# EAGLE board PowerBoard (EAGLE 9.6.2)
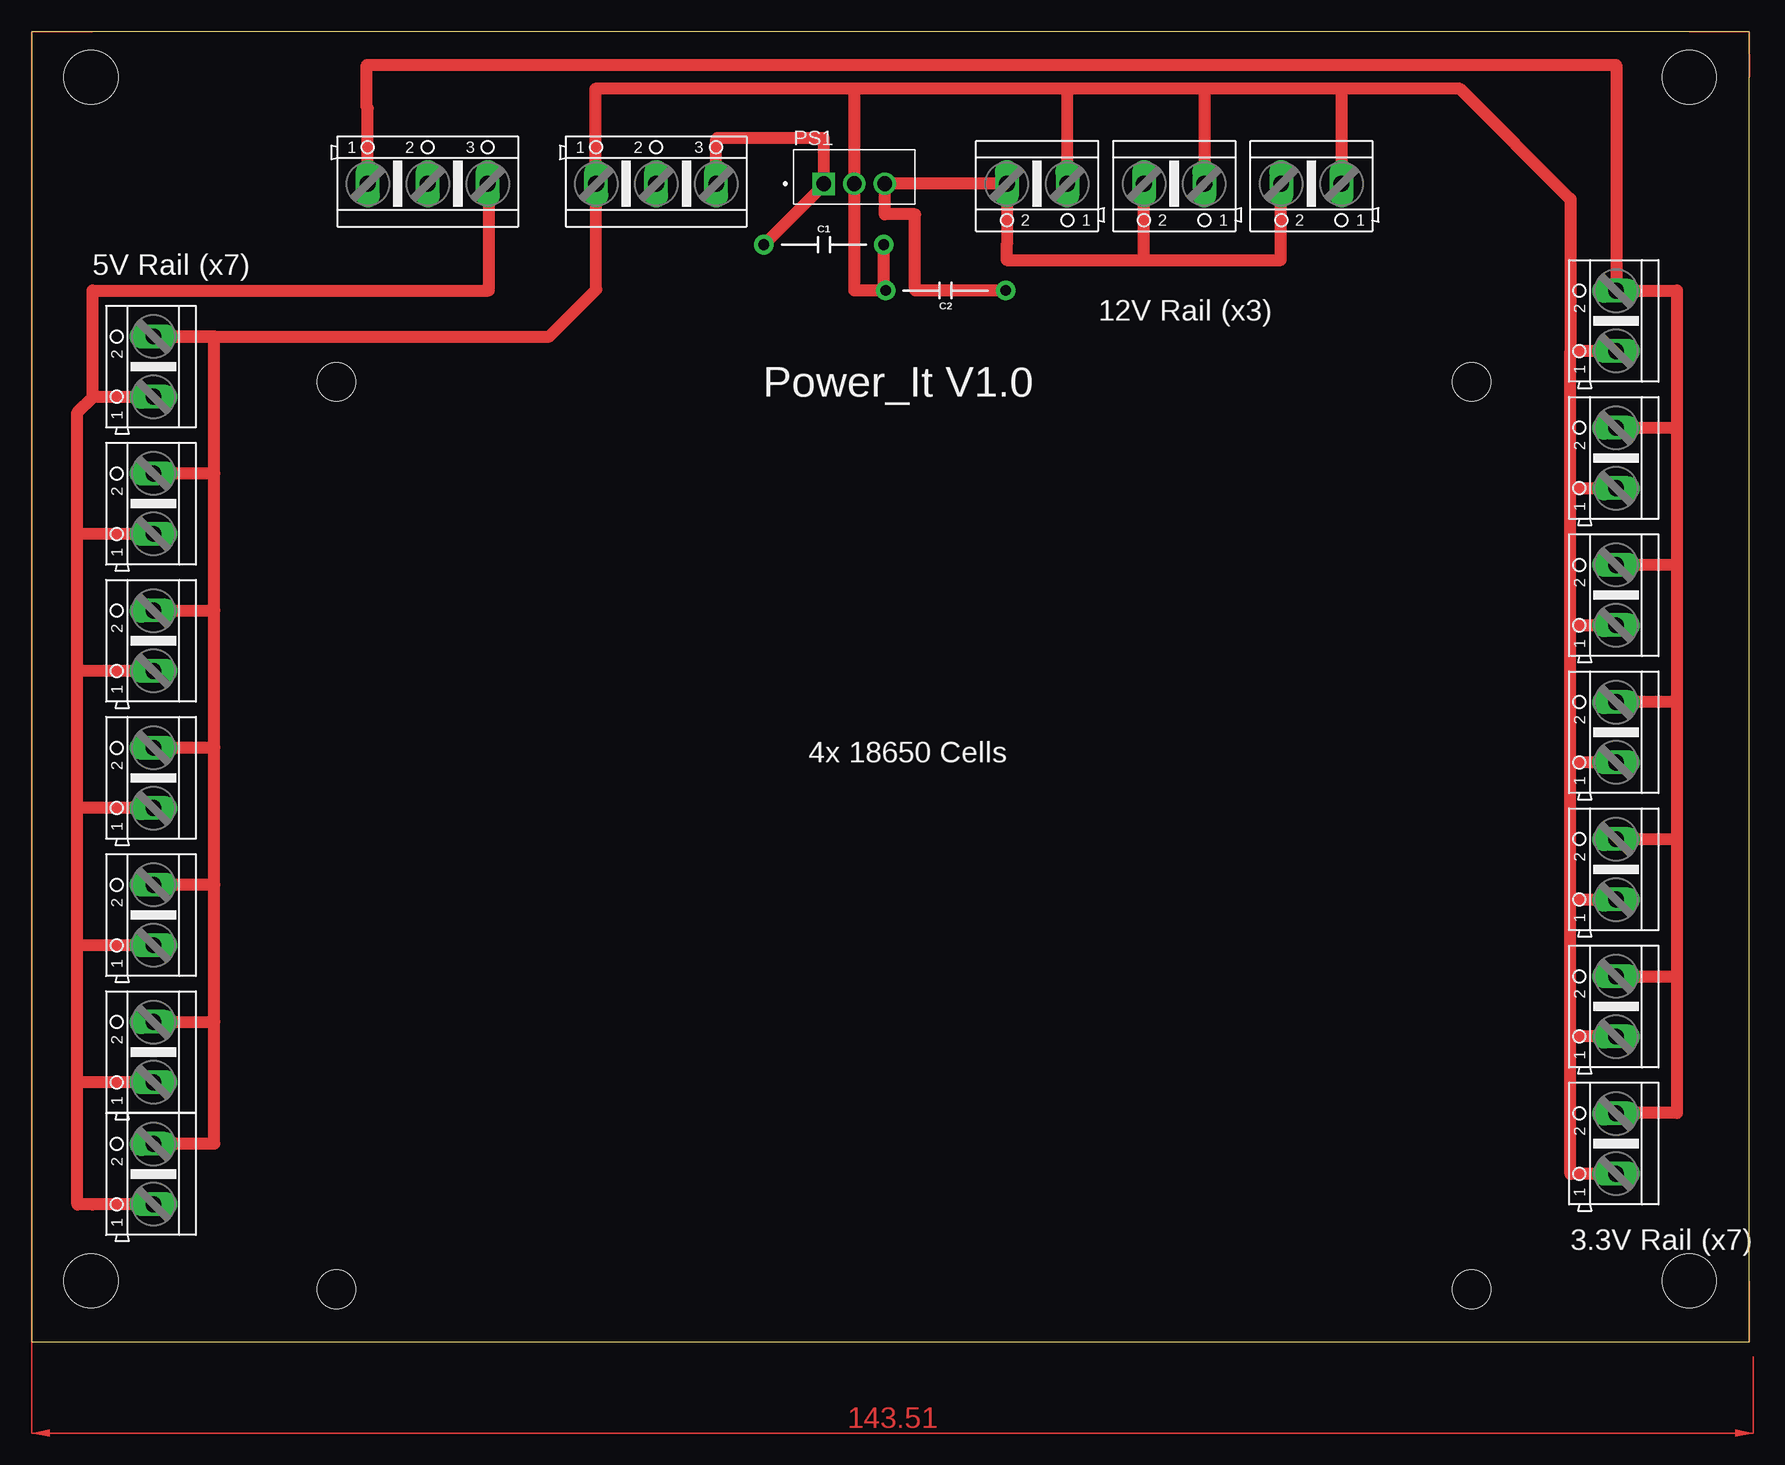
[diagram p0: board, top side]

Size 143.18 x 109.21 mm. Coordinates in mm from the lower left corner, seen from the top.
Outline: 0,0 143.18,0 143.18,109.21 0,109.21 0,0
Copper layers (1*16): Top 0.035mm / dielectric 1.5mm / Bottom 0.035mm
Design rules "PowerBoard": minimum track width 1mm, minimum drill 0.35mm, track to track 1mm, track to pad 1mm, pad to pad 0.205mm, via to via 0.205mm, smd to smd 6mil, copper to edge 40mil, drill to drill 6mil, minimum pad ring 10mil, minimum via ring 8mil, stop-mask expansion 4mil, vias tented up to drill 0mil, thermal gap 10mil
Holes 3.2 mm at 25.4,4.36 25.4,80.01 120.05,4.36 120.05,80.01
Holes 4.5 mm at 4.95,5.08 4.95,105.41 138.18,105.41 138.18,5.08

## Footprints (pad centres in the part's own frame; a part is rotated, then mirrored left to right if it is on the bottom)
CAP-PTH-10MM = drill 0.9 pad 1.651: 1 -5,0; 2 5,0
VREG_LM7812 = drill 1.24 square: 1 -2.54,0 | drill 1.24: 2 0,0; 3 2.54,0
AK500/3 = drill 1.321 long: 1 -5.004,0; 2 0,0; 3 5.004,0
AK500/2 = drill 1.321 long: 1 -2.515,0; 2 2.515,0

## Placement (x,y rotation side)
C1  10nF  [CAP-PTH-10MM]  66.04,91.44 0 top
C2  10nF  [CAP-PTH-10MM]  76.2,87.63 180 top
PS1  LM7812  [VREG_LM7812]  68.58,96.52 0 top
X1  [AK500/3]  33.02,96.52 0 top
X2  [AK500/3]  52.07,96.52 0 top
X3  [AK500/2]  10.16,81.28 90 top
X4  [AK500/2]  10.16,69.85 90 top
X5  [AK500/2]  10.16,58.42 90 top
X6  [AK500/2]  10.16,46.99 90 top
X7  [AK500/2]  10.16,35.56 90 top
X8  [AK500/2]  10.16,24.13 90 top
X9  [AK500/2]  10.16,13.97 90 top
X10  [AK500/2]  132.08,85.09 90 top
X11  [AK500/2]  132.08,73.66 90 top
X12  [AK500/2]  132.08,62.23 90 top
X13  [AK500/2]  132.08,50.8 90 top
X14  [AK500/2]  132.08,39.37 90 top
X15  [AK500/2]  132.08,27.94 90 top
X16  [AK500/2]  132.08,16.51 90 top
X17  [AK500/2]  83.82,96.52 180 top
X18  [AK500/2]  95.25,96.52 180 top
X19  [AK500/2]  106.68,96.52 180 top

## Library data of the parts
C1 C2 = SparkFun-Capacitors; PROD_ID: CAP-09321
PS1 = LM7812; AVAILABILITY: In Stock; DESCRIPTION: Linear Voltage Regulator IC Positive Fixed 1 Output 1.5A DDPAK/TO-263-3; MF: Texas Instruments; MP: LM7812; PACKAGE: None; PRICE: None; PURCHASE-URL: https://pricing.snapeda.com/search/part/LM7812/?ref=eda
X1-X19 = con-ptr500; OC_FARNELL: unknown; OC_NEWARK: unknown

## Nets
N$1: C1.1 PS1.1 X2.3
N$2: C1.2 C2.2 PS1.2 X2.1 X3.2 X4.2 X5.2 X6.2 X7.2 X8.2 X9.2 X10.1 X11.1 X12.1 X13.1 X14.1 X15.1 X16.1 X17.1 X18.1 X19.1
N$3: X1.3 X3.1 X4.1 X5.1 X6.1 X7.1 X8.1 X9.1
N$4: C2.1 PS1.3 X17.2 X18.2 X19.2
N$5: X1.1 X10.2 X11.2 X12.2 X13.2 X14.2 X15.2 X16.2

## Tracks (layer width: path | path; a pad name or v marks a point on that pad's centre or on a via)
N$1
  Top 1: X2.3 57.07,100.25 57.15,100.33 66.04,100.33 PS1.1 66.04,96.44 C1.1
N$2
  Top 1: X4.2 10.19,72.39 15.24,72.39 | 15.24,72.39 15.24,83.8 X3.2 43.16,83.8 47.07,87.71 X2.1 46.99,96.6 46.99,104.42 68.58,104.42 | 15.24,26.67 15.24,38.1 | 15.24,38.1 15.24,49.53 | 15.24,49.53 15.24,60.96 | 15.24,60.96 15.24,72.39 | X5.2 10.19,60.96 15.24,60.96 | X6.2 10.19,49.53 15.24,49.53 | X7.2 10.19,38.1 15.24,38.1 | X9.2 10.19,16.51 15.24,16.51 15.24,26.67 | X8.2 10.19,26.67 15.24,26.67 | X10.1 128.27,82.58 | 128.27,82.58 128.27,95.25 119.1,104.42 109.22,104.42 | X16.1 132.06,13.97 128.27,13.97 128.27,25.4 | 128.27,25.4 128.27,36.83 | 128.27,36.83 128.27,48.26 | 128.27,48.26 128.27,59.69 | 128.27,59.69 128.27,71.12 | 128.27,71.12 128.27,82.58 | X11.1 132.06,71.12 128.27,71.12 | X12.1 132.06,59.69 128.27,59.69 | X13.1 132.06,48.26 128.27,48.26 | X14.1 132.06,36.83 128.27,36.83 | X15.1 128.29,25.43 128.27,25.4 | C1.2 71.04,87.79 C2.2 68.58,87.63 PS1.2 68.58,104.42 | 109.22,104.42 97.79,104.42 | 97.79,104.42 86.36,104.42 | 86.36,104.42 68.58,104.42 | X17.1 86.36,96.55 86.36,104.42 | X18.1 97.79,96.55 97.79,104.42 | X19.1 109.22,96.55 109.22,104.42
N$3
  Top 1: 8.91,67.33 X4.1 3.83,67.33 3.81,67.31 | X1.3 38.1,96.44 38.1,87.63 5.08,87.63 5.08,78.74 | X3.1 10.13,78.74 5.08,78.74 | X9.1 5.11,11.46 5.08,11.43 3.81,11.43 3.81,21.59 | 3.81,21.59 3.81,33.02 | 3.81,33.02 3.81,44.45 | 3.81,44.45 3.81,55.88 | 3.81,55.88 3.81,67.31 | 3.81,67.31 3.81,77.47 5.08,78.74 | X5.1 3.83,55.91 3.81,55.88 | X6.1 3.83,44.48 3.81,44.45 | X7.1 3.83,33.05 3.81,33.02 | X8.1 3.83,21.61 3.81,21.59
N$4  (1 unrouted)
  Top 1: C2.1 73.66,87.63 73.66,93.98 71.12,93.98 PS1.3 X17.2 81.31,91.47 81.28,91.44 81.28,90.17 92.71,90.17 | 92.71,90.17 92.73,90.19 X18.2 | 92.71,90.17 104.14,90.17 104.14,96.52
N$5  (1 unrouted)
  Top 1: 137.16,76.2 137.16,87.63 132.1,87.63 X10.2 132.08,106.42 27.94,106.42 27.94,102.87 28.02,102.79 X1.1 | 137.16,76.2 137.16,64.77 | 137.16,64.77 137.16,53.34 | 137.16,53.34 137.16,41.91 | 137.16,41.91 137.16,30.48 | 137.16,30.48 137.16,19.05 132.08,19.05 | X11.2 132.1,76.2 137.16,76.2 | X12.2 132.1,64.77 137.16,64.77 | X13.2 132.1,53.34 137.16,53.34 | X14.2 132.1,41.91 137.16,41.91 | X15.2 137.13,30.45 137.16,30.48
(copper drawn outside any net)
  shapes: Top area x7

## Text on the board
tPlace: 5V Rail (x7) | 12V Rail (x3) | Power_It V1.0 | 4x 18650 Cells | 3.3V Rail (x7)